# EAGLE board Keyboard_Scanner_4p0_0p5 (EAGLE 9.6.2)
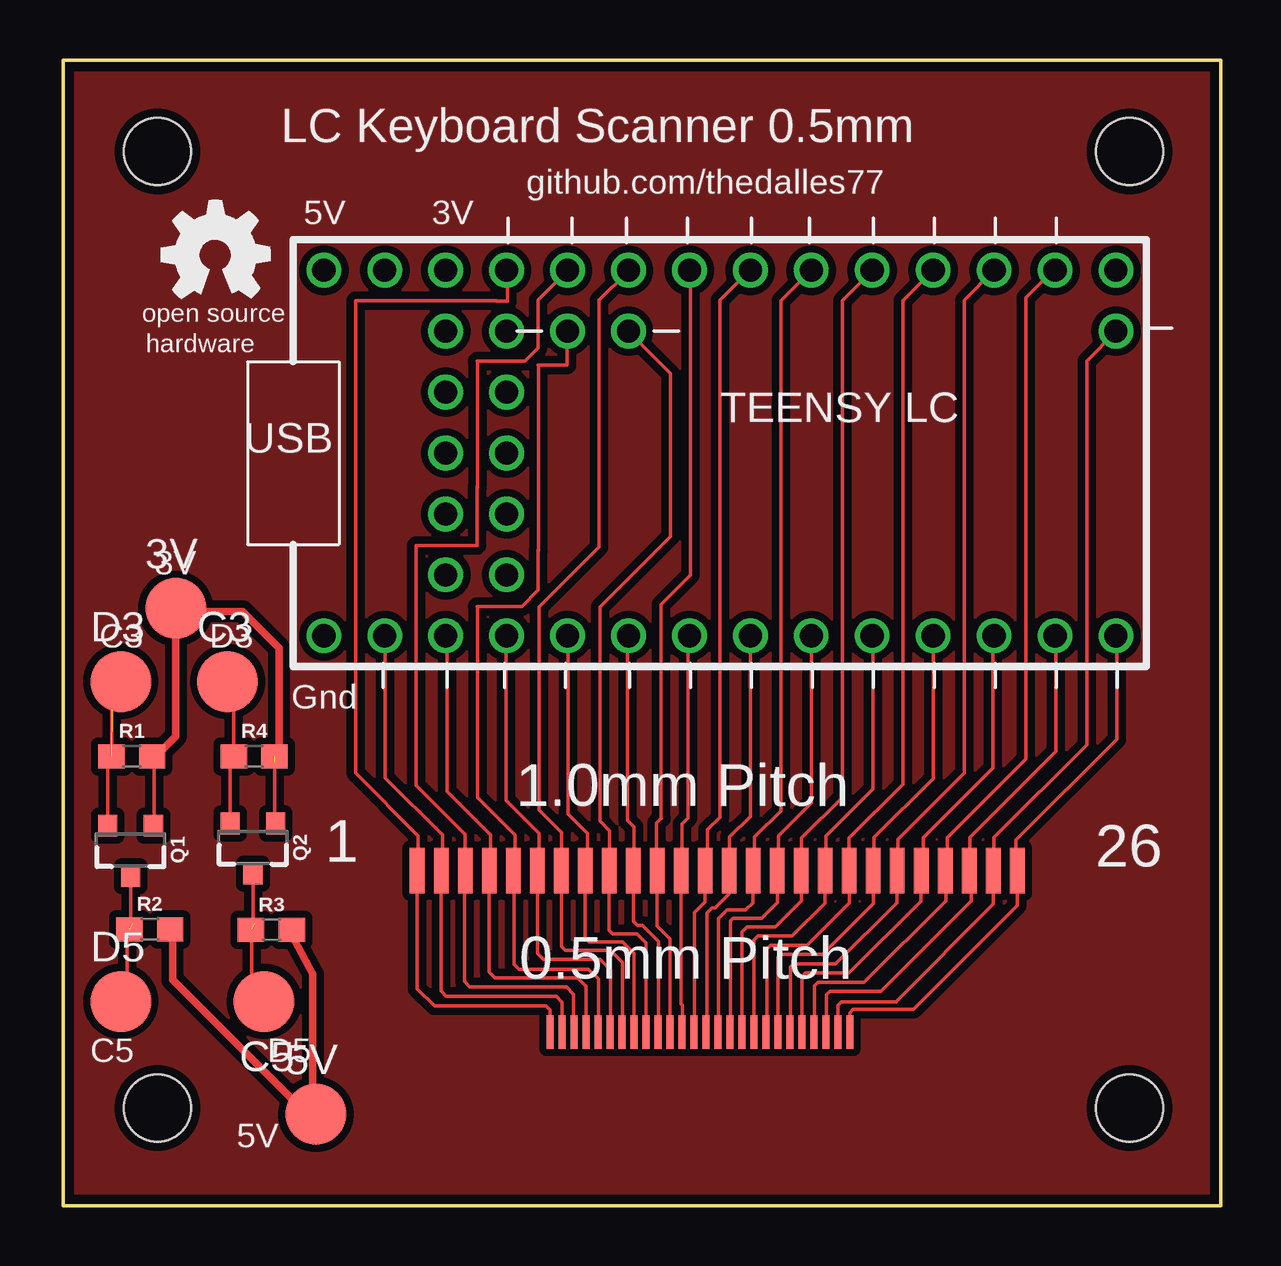
[diagram p0: board, top side]
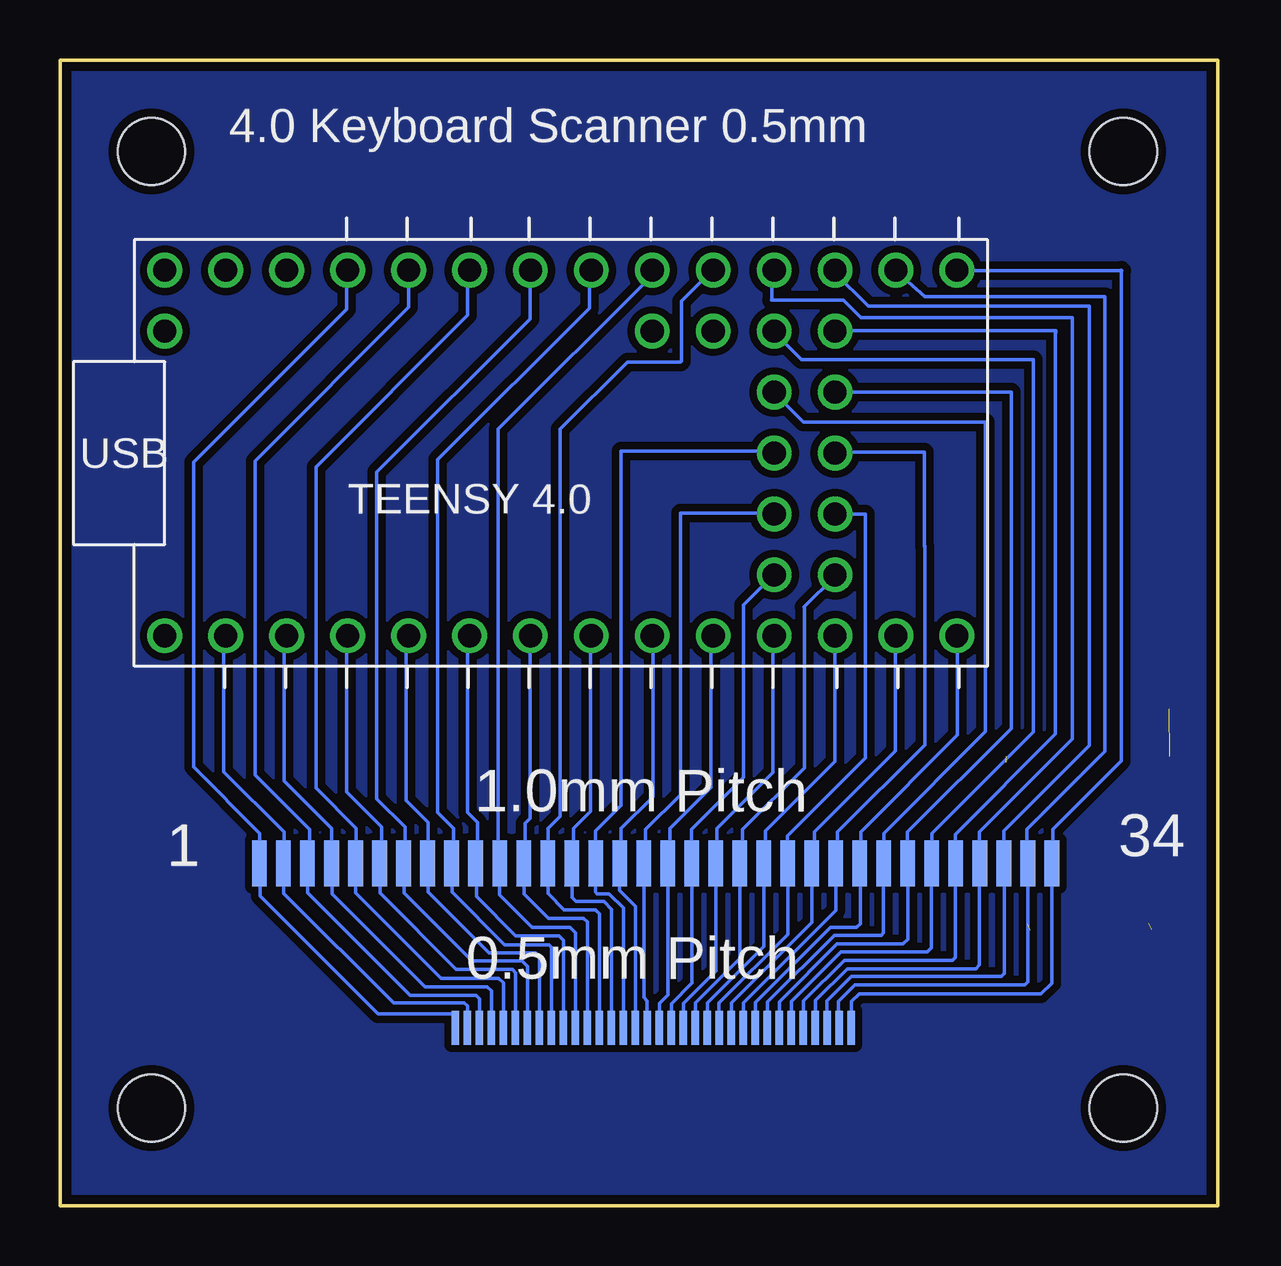
[diagram p1: board, bottom side, seen from below]

Size 48.26 x 47.75 mm. Coordinates in mm from the lower left corner, seen from the top.
Outline: 0,0 0,47.75 48.26,47.75 48.26,0 0,0
Copper layers (1*16): Top 0.035559375mm / dielectric 1.6mm / Bottom 0.035559375mm
Design rules "oshpark-2layer": minimum track width 6mil, minimum drill 10mil, track to track 6mil, track to pad 6mil, pad to pad 6mil, via to via 6mil, smd to smd 6mil, copper to edge 15mil, drill to drill 6mil, minimum pad ring 5mil, minimum via ring 5mil, stop-mask expansion 2.5mil, vias tented up to drill 0mil, thermal gap 10mil
Holes 2.8 mm at 44.45,4.06 44.45,43.94 3.94,43.94 3.94,4.06

## Footprints (pad centres in the part's own frame; a part is rotated, then mirrored left to right if it is on the bottom)
B2,54 = smd 2.54 x 2.54: TP 0,0
TEENSY_COMBO_4P0 = drill 0.965: 1 -11.43,7.62; 2 -13.97,7.62; 3 -16.51,7.62; 4 -6.35,5.08; 5 -3.81,5.08; 6 -11.43,0; 7 -8.89,2.54; 8 -11.43,2.54; 9 -8.89,5.08; 10 -11.43,5.08; 11 -8.89,0; 12 -11.43,-2.54; 13 -8.89,-2.54; 14 -11.43,-5.08; 15 -8.89,-5.08; A -16.51,-7.62; B -13.97,-7.62; C -11.43,-7.62; D -8.89,-7.62; E -6.35,-7.62; F -3.81,-7.62; G -1.27,-7.62; H 1.27,-7.62; I 3.81,-7.62; J 6.35,-7.62; K 8.89,-7.62; L 11.43,-7.62; M 13.97,-7.62; N 16.51,-7.62; O 16.51,5.08; P 16.51,7.62; Q 13.97,7.62; R 11.43,7.62; S 8.89,7.62; T 6.35,7.62; U 3.81,7.62; V 1.27,7.62; W -1.27,7.62; X -3.81,7.62; Y -6.35,7.62; Z -8.89,7.62
FPC_DUAL_FRONT_0P5 = smd 0.61 x 1.905: 1 11.836,3.429; 2 10.836,3.429; 3 9.835,3.429; 4 8.834,3.429; 5 7.833,3.429; 6 6.833,3.429; 7 5.832,3.429; 8 4.831,3.429; 9 3.83,3.429; 10 2.83,3.429; 11 1.829,3.429; 12 0.828,3.429; 13 -0.173,3.429; 14 -1.173,3.429; 15 -2.174,3.429; 16 -3.175,3.429; 17 -4.176,3.429; 18 -5.177,3.429; 19 -6.177,3.429; 20 -7.178,3.429; 21 -8.179,3.429; 22 -9.18,3.429; 23 -10.18,3.429; 24 -11.181,3.429; 25 -12.182,3.429; 26 -13.183,3.429 | smd 0.3 x 1.4: P$1 4.86,-3.3; P$2 4.36,-3.3; P$3 3.86,-3.3; P$4 3.36,-3.3; P$5 2.86,-3.3; P$6 2.36,-3.3; P$7 1.86,-3.3; P$8 1.36,-3.3; P$9 0.86,-3.3; P$10 0.36,-3.3; P$11 -0.14,-3.3; P$12 -0.64,-3.3; P$13 -1.14,-3.3; P$14 -1.64,-3.3; P$15 -2.14,-3.3; P$16 -2.64,-3.3; P$17 -3.14,-3.3; P$18 -3.64,-3.3; P$19 -4.14,-3.3; P$20 -4.64,-3.3; P$21 -5.14,-3.3; P$22 -5.64,-3.3; P$23 -6.14,-3.3; P$24 -6.64,-3.3; P$25 -7.14,-3.3; P$26 -7.64,-3.3
FPC_DUAL_BACK_0P5R1 = smd 0.61 x 1.905 bottom: 1 18.186,3.429; 2 17.186,3.429; 3 16.185,3.429; 4 15.184,3.429; 5 14.183,3.429; 6 13.183,3.429; 7 12.182,3.429; 8 11.181,3.429; 9 10.18,3.429; 10 9.18,3.429; 11 8.179,3.429; 12 7.178,3.429; 13 6.177,3.429; 14 5.177,3.429; 15 4.176,3.429; 16 3.175,3.429; 17 2.174,3.429; 18 1.173,3.429; 19 0.173,3.429; 20 -0.828,3.429; 21 -1.829,3.429; 22 -2.83,3.429; 23 -3.83,3.429; 24 -4.831,3.429; 25 -5.832,3.429; 26 -6.833,3.429; 79 -7.833,3.429; 80 -8.834,3.429; 81 -9.835,3.429; 82 -10.836,3.429; 83 -11.836,3.429; 84 -12.837,3.429; 85 -13.838,3.429; 86 -14.839,3.429 | smd 0.3 x 1.4 bottom: P$1 10.03,-3.42; P$2 9.53,-3.42; P$3 9.03,-3.42; P$4 8.53,-3.42; P$5 8.03,-3.42; P$6 7.53,-3.42; P$7 7.03,-3.42; P$8 6.53,-3.42; P$9 6.03,-3.42; P$10 5.53,-3.42; P$11 5.03,-3.42; P$12 4.53,-3.42; P$13 4.03,-3.42; P$14 3.53,-3.42; P$15 3.03,-3.42; P$16 2.53,-3.42; P$17 2.03,-3.42; P$18 1.53,-3.42; P$19 1.03,-3.42; P$20 0.53,-3.42; P$21 0.03,-3.42; P$22 -0.47,-3.42; P$23 -0.97,-3.42; P$24 -1.47,-3.42; P$25 -1.97,-3.42; P$26 -2.47,-3.42; P$27 -2.97,-3.42; P$28 -3.47,-3.42; P$29 -3.97,-3.42; P$30 -4.47,-3.42; P$31 -4.97,-3.42; P$32 -5.47,-3.42; P$33 -5.97,-3.42; P$34 -6.47,-3.42
SOT23-3 = smd 0.8 x 0.9: 1 -0.95,-1; 2 0.95,-1; 3 0,1.1
0603 = smd 1.1 x 1: 1 -0.85,0; 2 0.85,0

## Placement (x,y rotation side)
3V  [B2,54]  4.7,24.89 0 top  (not fitted)
5V  [B2,54]  10.54,3.81 0 top  (not fitted)
C3  [B2,54]  6.86,21.84 0 top  (not fitted)
C5  [B2,54]  8.38,8.51 180 top  (not fitted)
D3  [B2,54]  2.41,21.84 0 top  (not fitted)
D5  [B2,54]  2.41,8.51 0 top  (not fitted)
E$1  [TEENSY_COMBO_4P0]  27.38,31.37 0 top
E$2  [FPC_DUAL_FRONT_0P5]  27.95,10.53 0 top
E$3  [FPC_DUAL_BACK_0P5R1]  21.75,10.83 0 top
E$4  [OSHW_5MM]  6.35,39.62 0 top
Q1  220mA/50V/3.5Ω  [SOT23-3]  2.82,14.83 180 top
Q2  220mA/50V/3.5Ω  [SOT23-3]  7.92,14.93 180 top
R1  10k  [0603]  2.87,18.73 0 top
R2  10k  [0603]  3.62,11.52 0 top
R3  10k  [0603]  8.69,11.49 0 top
R4  10k  [0603]  7.97,18.73 0 top

## Library data of the parts
3V 5V C3 C5 D3 D5 = testpad
E$1 = Teensy_Combo_4p0
E$2 = FPC_Dual_front_0p5
E$3 = FPC_Dual_back_0p5r1
E$4 = oshw
Q1 Q2 = SparkFun-DiscreteSemi; PROD_ID: TRANS-00830
R1-R4 = SparkFun-Resistors; PROD_ID: RES-00824

## Nets
3V: R4.2
5V: R2.2
CLK: Q1.2 R1.1
DATA: Q2.2 R4.1
S$33: E$1.R
S$127: R3.2
TP_CLK: Q1.3 R2.1
TP_DATA: Q2.3 R3.1

## Tracks (layer width: path | path; a pad name or v marks a point on that pad's centre or on a via)
3V  (1 unrouted)
  Top 0.152: 8.82,18.47 8.82,15.67
5V
  Top 0.813: 4.52,11.47 R2.2
CLK  (1 unrouted)
  Top 0.152: Q1.2 1.87,18.63 2.03,18.98 2.03,20.7
CLK1
  Top 0.152: 2.67,9.2 2.67,11.56
CLK2
  Top 0.152: 7.86,8.82 7.86,11.18
DATA
  Top 0.152: Q2.2 6.97,18.63 R4.1 7.12,21.08
S$1
  Top 0.152: 14.77,13.05 14.77,9.04 15.48,8.32 20.14,8.32 20.31,8.15 20.31,7.79 20.32,7.78
S$2
  Top 0.152: 15.75,13.12 15.75,8.95 15.97,8.72 20.57,8.72 20.8,8.48 20.8,7.83
S$3
  Top 0.152: 16.73,13.15 16.73,9.34 16.95,9.12 20.98,9.12 21.29,8.8 21.29,7.84 21.34,7.79
S$4
  Top 0.152: 17.77,13.22 17.77,9.74 18.02,9.49 21.45,9.49 21.8,9.13 21.8,7.79
S$5
  Top 0.152: 18.8,13.12 18.8,10.06 19,9.86 21.91,9.86 22.32,9.44 22.32,7.8
S$6
  Top 0.152: 19.79,13.09 19.79,10.51 20.04,10.27 22.39,10.27 22.82,9.84 22.82,7.79
S$7
  Top 0.152: 20.79,13.09 20.79,10.8 20.95,10.64 22.82,10.64 23.32,10.14 23.32,7.84
S$8
  Top 0.152: 21.77,13.15 21.77,11.14 21.93,10.99 23.32,10.99 23.8,10.51 23.8,7.79
S$9
  Top 0.152: 22.75,13.15 22.75,11.47 22.91,11.31 23.93,11.31 24.3,10.96 24.3,7.75
S$10
  Top 0.152: 23.78,13.09 23.78,11.85 23.95,11.68 24.16,11.68 24.82,11.02 24.82,7.79
S$11
  Top 0.152: 24.76,13.12 24.76,11.66 25.31,11.11 25.31,7.74 25.31,7.72
S$12
  Top 0.152: 25.76,13.09 25.76,8.41 25.83,8.34 25.83,7.79 25.81,7.78
S$13
  Top 0.152: 26.75,13.12 26.75,12.65 26.32,12.22 26.32,7.78
S$14
  Top 0.152: 27.77,13.19 27.77,13 27.17,12.4 27.05,12.4 26.84,12.19 26.84,7.8 26.86,7.83
S$15
  Top 0.152: 28.75,13.14 28.75,12.62 28.45,12.32 27.68,12.32 27.32,11.97 27.32,7.65
S$16
  Top 0.152: 29.78,13.11 29.78,12.64 29.11,11.97 27.93,11.97 27.82,11.87 27.82,7.75
S$17
  Top 0.152: 30.78,13.14 30.78,12.69 29.7,11.61 28.5,11.61 28.3,11.41 28.3,7.78
S$18
  Top 0.152: 31.76,13.17 31.76,12.6 30.39,11.23 28.96,11.23 28.8,11.07 28.8,7.74
S$19
  Top 0.152: 32.77,13.09 32.77,12.62 31,10.85 29.48,10.85 29.34,10.71 29.34,7.68
S$20
  Top 0.152: 33.79,13.09 33.79,12.59 31.66,10.46 29.91,10.46 29.8,10.35 29.8,7.78
S$21
  Top 0.152: 34.75,13.11 34.75,12.62 32.2,10.08 30.44,10.08 30.32,9.96 30.32,7.78 30.34,7.79
S$22
  Top 0.152: 35.77,13.21 35.77,12.69 32.77,9.69 30.95,9.69 30.8,9.54 30.8,7.78
S$23
  Top 0.152: 31.36,7.75 31.33,7.79 31.33,9.15 31.48,9.3 33.4,9.3 36.8,12.7 36.8,13.21
S$24
  Top 0.152: 31.83,7.75 31.83,8.78 31.98,8.93 34.09,8.93 37.85,12.69
S$25
  Top 0.152: 34.71,8.48 38.79,12.56 38.79,13.13 38.78,13.14
S$26
  Top 0.152: 34.73,8.48 32.45,8.48 32.3,8.35 32.3,7.76
S$27
  Top 0.152: 43.92,23.7 43.92,19.43 39.73,15.24 39.73,14.3
S$28
  Top 0.152: 43.92,36.4 43.74,36.4
S$29
  Top 0.152: 43.89,36.42 42.67,35.2 42.67,19.2 38.81,15.34 38.81,14.25
S$30
  Top 0.152: 41.38,23.72 41.38,18.92 37.8,15.34 37.8,14.22 37.77,14.2
S$31
  Top 0.152: 41.33,38.91 41.2,38.91 40.13,37.85 40.13,18.62 36.85,15.34 36.85,14.45 36.8,14.4
S$32
  Top 0.152: 38.76,23.72 38.76,18.24 35.87,15.34 35.87,14.3
S$33
  Top 0.152: E$1.R 37.57,37.74 37.57,18.03 34.8,15.27 34.8,14.35 34.75,14.3
S$34
  Top 0.152: 36.27,23.72 36.27,17.8 33.81,15.34 33.81,14.4
S$35
  Top 0.152: 36.22,38.91 36.2,38.91 35,37.72 35,17.55 32.77,15.32 32.77,14.3
S$36
  Top 0.152: 33.76,23.72 33.76,17.37 31.8,15.42 31.8,14.2
S$37
  Top 0.152: 33.73,38.91 33.66,38.91
S$38
  Top 0.152: 31.85,14.3 31.8,14.25
S$39
  Top 0.152: 33.73,38.94 33.71,38.94 32.49,37.72 32.49,17.02 30.79,15.32 30.79,14.2
S$40
  Top 0.152: 31.19,23.65 31.19,16.79 29.82,15.42 29.82,14.28 29.79,14.25
S$41
  Top 0.152: 31.11,38.94 31.11,38.91 29.92,37.72 29.92,16.46 28.83,15.37 28.83,14.3
S$42
  Top 0.152: 28.65,23.67 28.65,16.23 27.79,15.37 27.79,14.3 27.76,14.28
S$43
  Top 0.152: 28.65,39.01 27.38,37.74 27.38,16.18 26.87,15.67 26.87,14.25
S$44
  Top 0.152: 26.06,23.67 26.06,16.15 25.81,15.9 25.81,14.22 25.88,14.15
S$45
  Top 0.152: 26.16,38.91 26.16,26.29 24.92,25.04 24.92,16.15 24.94,16.13 24.92,16.13 24.74,15.95 24.74,14.28 24.71,14.25
S$46
  Top 0.152: 23.52,23.72 23.52,16.05 23.8,15.77 23.8,14.25 23.75,14.2
S$47
  Top 0.152: 23.65,36.45 23.65,36.35 25.32,34.67 25.32,27.89 22.38,24.94 22.38,16.03 22.78,15.62 22.78,14.15 22.84,14.1
S$48
  Top 0.152: 21.06,23.72 21.06,16.33 21.87,15.52 21.87,14.38 21.84,14.35
S$49
  Top 0.152: 23.57,38.91 23.52,38.91 22.35,37.74 22.35,27.46 19.84,24.94 19.84,16.48 20.78,15.54 20.78,14.28
S$50
  Top 0.152: 18.47,23.65 18.47,16.89 19.84,15.52 19.84,14.28 19.81,14.25
S$51
  Top 0.152: 19.81,35.03 19.81,27.31
S$52
  Top 0.152: 16,23.75 16,17.27 17.83,15.44 17.83,14.28
S$53
  Top 0.152: 14.72,27.52 14.72,17.51 16.76,15.47 16.76,14.38 16.74,14.35
S$54
  Top 0.152: 13.44,23.77 13.44,17.83 15.82,15.44 15.82,14.3 15.8,14.28
S$55
  Top 0.152: 12.2,37.69 12.2,18.03 14.81,15.42 14.81,14.3 14.78,14.28
S$56
  Bottom 0.152: 6.92,13.37 6.92,9.27 7.37,8.82 14.95,8.82 15.27,8.51 15.27,7.91
S$57
  Bottom 0.152: 7.91,13.49 7.91,9.32 8.04,9.2 15.12,9.2 15.8,8.52 15.8,7.84
S$58
  Bottom 0.152: 8.9,13.53 8.9,9.67 9.03,9.55 15.28,9.55 16.29,8.54 16.29,7.91
S$59
  Bottom 0.152: 9.93,13.51 9.93,10.03 10.09,9.87 15.45,9.87 16.77,8.54 16.77,7.85
S$60
  Bottom 0.152: 10.93,13.57 10.93,10.35 11.05,10.22 15.57,10.22 17.27,8.53 17.27,7.97
S$61
  Bottom 0.152: 11.94,13.46 11.94,10.73 12.11,10.56 15.71,10.56 17.77,8.51 17.77,7.94
S$62
  Bottom 0.152: 12.92,13.44 12.92,11.11 13.12,10.9 15.87,10.9 18.27,8.49 18.27,7.96
S$63
  Bottom 0.152: 13.93,13.41 13.93,11.37 14.03,11.27 15.98,11.27 18.77,8.48 18.77,8
S$64
  Bottom 0.152: 14.9,13.4 14.9,11.74 15.05,11.6 16.16,11.6 19.28,8.47 19.28,7.92
S$65
  Bottom 0.152: 15.93,13.45 15.93,12.3 19.77,8.46 19.77,7.99
S$66
  Bottom 0.152: 16.93,13.47 16.93,11.81 20.28,8.46 20.28,8
S$67
  Bottom 0.152: 17.92,13.5 17.92,11.3 20.79,8.44 20.79,8.02
S$68
  Bottom 0.152: 18.93,13.48 18.93,10.8 21.27,8.46 21.27,8
S$69
  Bottom 0.152: 19.91,13.41 19.91,10.31 21.78,8.44 21.78,7.99
S$70
  Bottom 0.152: 20.92,13.43 20.92,9.79 22.27,8.43 22.27,8.06
S$71
  Bottom 0.152: 21.91,13.45 21.91,9.28 22.78,8.4 22.78,8
S$72
  Bottom 0.152: 22.91,13.44 22.91,8.79 23.28,8.42 23.28,8.03
S$73
  Bottom 0.152: 23.93,13.46 23.93,8.67 23.79,8.53 23.79,7.99
S$74
  Bottom 0.152: 24.93,13.51 24.93,13.13 24.28,12.48 24.28,8.04
S$75
  Bottom 0.152: 25.93,13.48 25.93,13.06 25.86,13 25.36,13 24.78,12.41 24.78,8.01
S$76
  Bottom 0.152: 26.91,13.46 26.91,12.84 26.75,12.67 25.59,12.67 25.27,12.36 25.27,8.03
S$77
  Bottom 0.152: 27.91,13.46 27.91,13.01 27.24,12.33 25.93,12.33 25.77,12.16 25.77,7.99
S$78
  Bottom 0.152: 28.92,13.48 28.92,13 27.89,11.97 26.43,11.97 26.27,11.81 26.27,7.99
S$79
  Bottom 0.152: 29.93,13.41 29.93,12.95 28.59,11.6 27,11.6 26.77,11.37 26.77,7.94
S$80
  Bottom 0.152: 30.91,13.41 30.91,12.88 29.26,11.24 27.46,11.24 27.28,11.06 27.28,8.03 27.27,8.03 27.29,8.01 27.29,7.96
S$81
  Bottom 0.152: 31.93,13.41 31.93,13.07 29.72,10.87 27.88,10.87 27.77,10.77 27.77,8.04
S$82
  Bottom 0.152: 32.92,13.41 32.92,13.07 30.38,10.53 28.43,10.53 28.28,10.38 28.28,8.04
S$83
  Bottom 0.152: 33.92,13.4 33.92,13.03 31.09,10.2 29,10.2 28.77,9.97 28.77,8.01
S$84
  Bottom 0.152: 34.92,13.4 34.92,13.03 31.74,9.85 29.4,9.85 29.27,9.71 29.27,8.01
S$85
  Bottom 0.152: 35.93,13.43 35.93,13.04 32.37,9.47 29.97,9.47 29.77,9.28 29.77,7.99
S$86
  Bottom 0.152: 36.92,13.39 36.92,12.99 33.05,9.12 30.45,9.12 30.27,8.94 30.27,7.97
S$87
  Bottom 0.152: 37.93,13.41 37.93,13.03 33.67,8.77 30.93,8.77 30.77,8.62 30.77,7.96
S$88
  Bottom 0.152: 38.93,13.41 38.93,13.02 34.35,8.45 31.41,8.45 31.28,8.31 31.28,7.89
S$89
  Bottom 0.152: 31.84,7.99 34.99,7.99 39.91,12.91 39.91,13.48
S$90
  Bottom 0.152: 36.32,38.91 36.32,37.36 42.7,30.99 42.7,18.29 39.93,15.52 39.93,13.99 39.88,13.95
S$91
  Bottom 0.152: 41.43,23.7 41.43,18.09 38.91,15.57 38.91,14.25 38.86,14.2
S$92
  Bottom 0.152: 33.73,38.91 33.73,37.44 40.13,31.04 40.13,17.96 37.85,15.67 37.85,14.3
S$93
  Bottom 0.152: 38.91,23.7 38.91,17.7 36.93,15.72 36.93,14.1
S$94
  Bottom 0.152: 31.27,38.96 31.27,37.11 37.59,30.79 37.59,17.4 35.92,15.72 35.92,14.15 36.02,14.05
S$95
  Bottom 0.152: 36.32,23.85 36.32,17.25 34.85,15.77 34.85,14.2 34.9,14.15
S$96
  Bottom 0.152: 28.68,38.91 28.68,36.96 35.05,30.58 35.05,16.94 33.88,15.77 33.88,14.4 33.98,14.3
S$97
  Bottom 0.152: 33.83,23.7 33.83,16.89 32.92,15.98 32.92,14.1 32.97,14.05
S$98
  Bottom 0.152: 26.19,38.91 26.19,37.41 32.51,31.09 32.51,16.38 31.85,15.72 31.85,14.1
S$99
  Bottom 0.152: 31.27,23.7 31.27,16.38 30.86,15.98 30.86,14.1
S$100
  Bottom 0.152: 23.65,38.96 23.65,38.71 30,32.36 30,14.15 30.05,14.1
S$101
  Bottom 0.152: 28.68,23.65 28.68,16.13 28.88,15.93 28.88,14.15
S$102
  Bottom 0.152: 21.03,38.96 21.08,38.96 22.35,37.69 22.35,35.2 22.4,35.15 24.61,35.15 27.41,32.36 27.41,16.23 27.91,15.72 27.91,14.1 27.96,14.05
S$103
  Bottom 0.152: 26.14,23.65 26.14,16.43 26.85,15.72 26.85,14.1
S$104
  Bottom 0.152: 24.87,25.55 24.87,16.69 25.93,15.62 25.93,14.05
S$105
  Bottom 0.152: 23.55,23.65 23.55,17.04 24.87,15.72 24.87,14.15 24.97,14.05
S$106
  Bottom 0.152: 22.4,25.69 22.4,17.12 23.85,15.67 23.85,14.05
S$107
  Bottom 0.152: 21.13,23.65 21.13,17.42 22.84,15.72 22.84,14.15
S$108
  Bottom 0.152: 19.76,25.03 19.76,17.86 21.95,15.67 21.95,14.1 22,14.05
S$109
  Bottom 0.152: 18.54,23.7 18.54,18.06 20.88,15.72 20.88,14.2
S$110
  Bottom 0.152: 17.23,24.94 17.23,18.25 19.81,15.67 19.81,14.2 19.86,14.15
S$111
  Bottom 0.152: 15.95,23.65 15.95,18.52 18.85,15.62 18.85,13.99
S$112
  Bottom 0.152: 14.68,25.05 14.68,18.67 17.93,15.42 17.93,13.95 17.98,13.89
S$113
  Bottom 0.152: 13.44,23.65 13.44,18.95 16.82,15.57 16.82,13.89
S$114
  Bottom 0.152: 12.22,27.48 12.22,19.2 15.85,15.57 15.85,14.05
S$115
  Bottom 0.152: 10.85,23.65 10.85,19.61 14.88,15.57 14.88,14.25 14.83,14.2
S$116
  Bottom 0.152: 9.68,28.52 9.68,19.76 13.92,15.52 13.92,14.2 13.97,14.15
S$117
  Bottom 0.152: 8.61,28.55 8.61,19.89 12.93,15.57 12.93,14.15
S$118
  Bottom 0.152: 7.7,28.7 7.7,19.74 11.91,15.52 11.91,14.05 11.96,14.05 12.01,14.1
S$119
  Bottom 0.152: 6.76,36.41 6.76,19.66 10.95,15.47 10.95,14.25 11.1,14.1
S$120
  Bottom 0.152: 6.06,37.01 6.06,19.44 9.93,15.57 9.93,14.1 9.98,14.05 9.98,14.1
S$121
  Bottom 0.152: 5.35,37.48 5.35,19.19 8.91,15.62 8.91,14.25 8.97,14.2
S$122
  Bottom 0.152: 4.7,30.28 4.7,18.92 7.95,15.67 7.95,14.2 8,14.15
S$123
  Bottom 0.152: 4.01,38.98 4.01,18.54 6.88,15.67 6.88,14.1 6.93,14.05
S$124
  pour Top (isolate 0.305): 0,0 0,47.75 48.26,47.75 48.26,0
S$125
  pour Bottom (isolate 0.305): 0,0 0,47.75 48.26,47.75 48.26,0
S$127
  Top 0.152: 9.4,11.49 R3.2
S$128
  Top 0.305: 9.65,11.05 10.41,9.65 10.41,4.83
S$129
  Top 0.305: 9.65,4.32 4.57,9.4 4.57,11.18
S$130
  Top 0.305: 9.02,19.05 9.02,23.24 7.49,24.77 5.59,24.77
S$131
  Top 0.305: 4.7,23.88 4.7,19.56 4.06,18.92
S$132
  Bottom 0.152: 18.59,39.01 18.59,37.78
S$133
  Top 0.152: 3.81,16.13 3.81,18.41
S$134
  Bottom 0.152: 18.6,37.75 15.61,37.75 14.87,37.01
S$135
  Bottom 0.152: 10.91,38.98 4.01,38.98
S$136
  Bottom 0.152: 13.45,39 12.21,37.88 4.7,37.88 4.7,30.27
S$137
  Bottom 0.152: 16,38.91 14.57,37.48 5.35,37.48
S$138
  Bottom 0.152: 14.88,37.01 6.06,37.01
S$139
  Top 0.152: 18.06,37.71 12.2,37.71
S$140
  Top 0.152: 18.53,39.06 18.53,37.71 18.06,37.71
S$141
  Top 0.152: 17.27,24.97 17.27,17.02 18.85,15.44 18.85,14.22 18.8,14.17
S$142
  Top 0.152: 19.81,27.32 19.81,25.65 19.13,24.97 17.27,24.97
S$143
  Top 0.152: 17.27,35.2 17.27,29.93
S$144
  Top 0.152: 14.72,27.52 17.27,27.52 17.27,30
S$145
  Bottom 0.152: 15.97,36.47 6.76,36.47 6.76,36.39
S$146
  Top 0.152: 21.02,36.45 21.02,35.04 19.81,35.04
S$147
  Top 0.152: 21.04,38.98 19.8,37.74 19.8,35.75 19.26,35.21 17.27,35.21
S$148
  Bottom 0.152: 7.7,28.7 7.7,35.26 17.36,35.26 18.52,36.42
S$149
  Bottom 0.152: 15.95,33.9 8.61,33.9 8.61,28.48
S$150
  Bottom 0.152: 9.68,28.53 9.68,32.66 17.27,32.66 18.57,33.96
S$151
  Bottom 0.152: 16.02,31.41 12.22,31.41 12.22,27.47
S$152
  Bottom 0.152: 18.51,31.44 24.87,31.44 24.87,25.54
S$153
  Bottom 0.152: 15.98,28.82 14.68,28.82 14.68,25.04
S$154
  Bottom 0.152: 18.49,28.86 22.4,28.86 22.4,25.62
S$155
  Bottom 0.152: 17.24,24.94 15.93,26.25
S$156
  Bottom 0.152: 19.76,25.04 18.5,26.3
S$157
  Top 0.152: 32.8,7.83 32.8,8.04 32.94,8.18 35.44,8.18 39.77,12.51 39.77,13.09 39.79,13.1
S$158
  Top 0.152: 37.85,12.69 37.85,13.17
TP_CLK  (1 unrouted)
  Top 0.152: Q1.3 2.82,11.85 2.89,11.77
TP_DATA  (1 unrouted)
  Top 0.152: Q2.3 7.92,11.79 7.97,11.74

## Text on the board
tPlace: LC Keyboard Scanner 0.5mm | github.com/thedalles77 | 5V | 3V | 3V | C3 | D3 | Gnd | 1.0mm Pitch | 1 | 26 | 0.5mm Pitch | C5 | D5 | 5V
bPlace: 4.0 Keyboard Scanner 0.5mm | 1.0mm Pitch | 34 | 1 | 0.5mm Pitch
Document: 25 | 24 | 26 | 27 | 28 | 29 | 30 | 31 | 32 | 33